# Altium PCB 拼版.PcbDoc (part 3 of 3)
Units mm, origin at the board's own origin, x right, y up, seen from the top; angles counter-clockwise.
Board outline 152.4 x 101.6 mm, 4 copper layers (Top Layer, Mid-Layer 1, Mid-Layer 2, Bottom Layer); 303 components, 0 nets, 1078 pads, 478 vias.
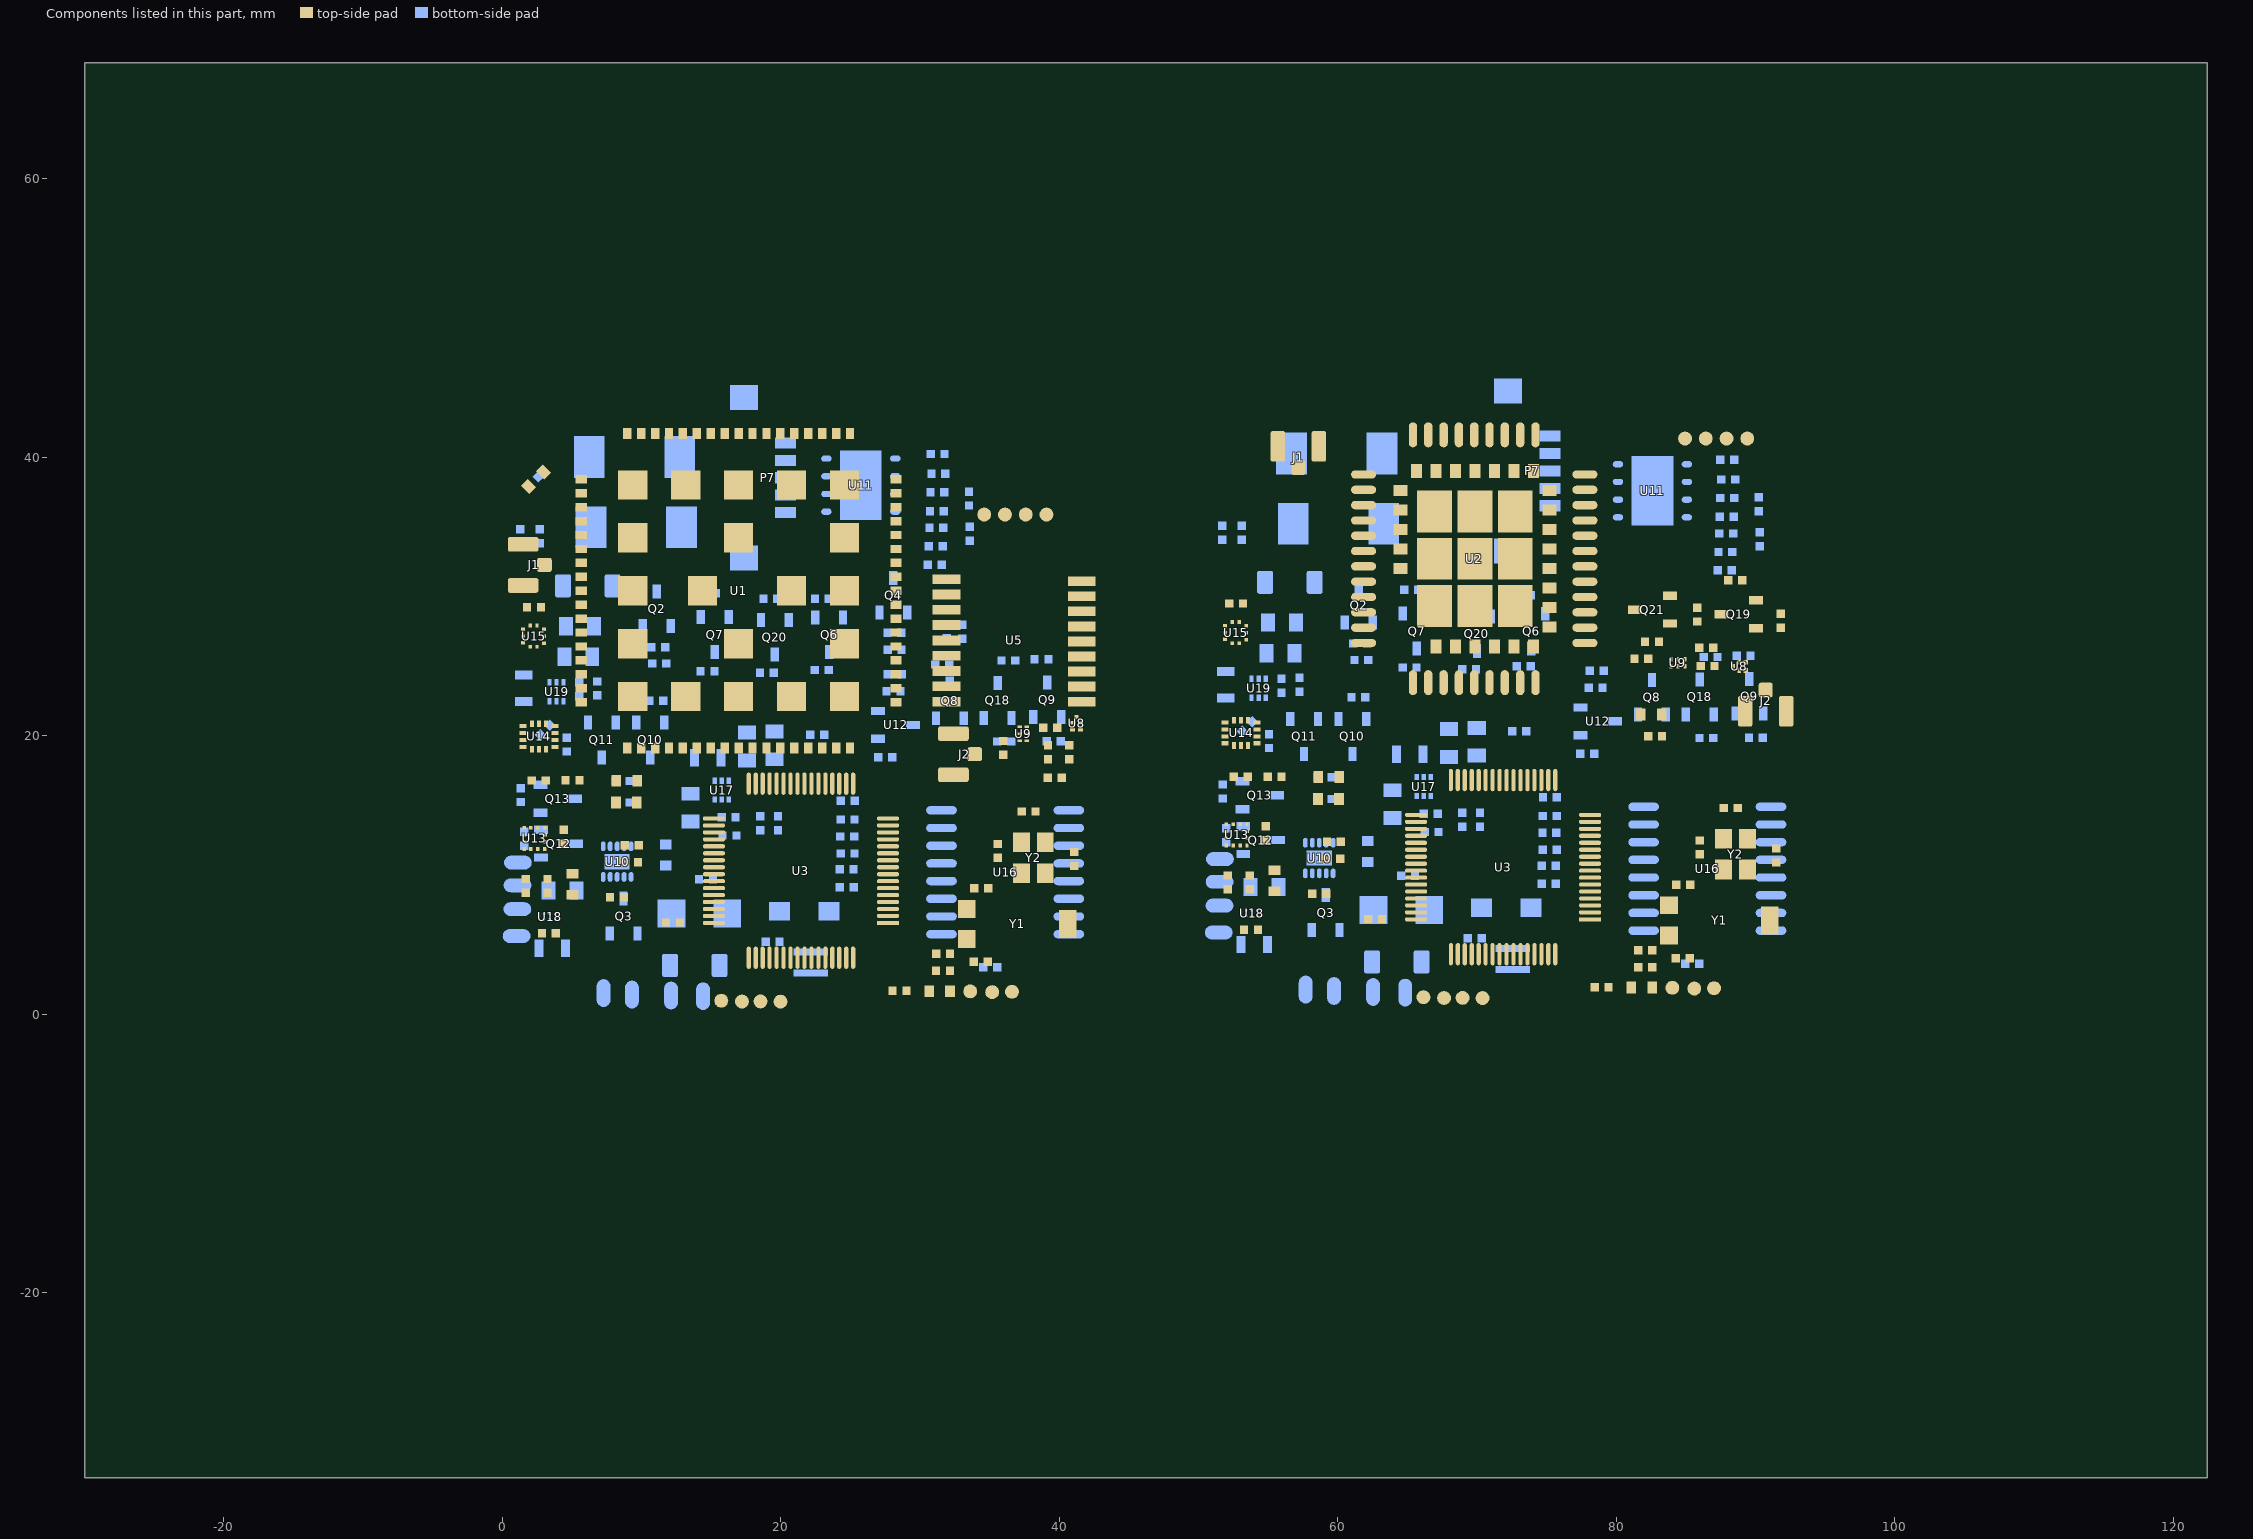
[diagram p5: the components of this part, seen from the top]

## Other copper (continued)
Bottom Layer:
  rectangle: 57.76,10.668 60.487,11.735
  rectangle: 6.35,10.439 10.085,11.455
  region: 63.285,16.564 64.676,16.564 65.322,15.918 65.817,15.918 65.835,15.9 65.835,15.458 65.813,15.436 65.808,15.441 65.424,15.441 65.33,15.348 63.431,15.348 63.285,15.494
  region: 66.526,17.279 66.529,17.282 66.882,17.282 67.315,17.715 67.315,18.98 67.382,19.048 70.631,19.048 70.675,19.004 70.675,18.086 70.465,17.876 68.215,17.876 67.126,16.787 66.526,16.787
  region: 54.211,24.603 54.213,24.6 54.213,24.156 54.248,24.122 54.448,24.122 54.448,25.013 54.012,25.448 53.019,25.448 52.619,25.048 51.326,25.048 51.238,24.96 51.238,24.352 51.327,24.263 52.594,24.263 52.939,24.607 54.173,24.607 54.173,24.196 54.214,24.155
  region: 54.284,40.608 55.841,42.164 57.812,42.164 58.124,41.853 58.124,33.705 55.989,31.57 55.989,30.972 55.596,30.579 55.596,24.471 56.303,24.395 56.316,23.697 55.323,23.632 55.049,23.826 54.625,23.823 54.644,24.999 54.314,25.46
  region: 12.866,16.31 14.257,16.31 14.903,15.664 15.398,15.664 15.416,15.646 15.416,15.204 15.394,15.182 15.389,15.187 15.005,15.187 14.911,15.094 13.012,15.094 12.866,15.24
  region: 16.107,17.025 16.11,17.028 16.463,17.028 16.896,17.461 16.896,18.726 16.963,18.794 20.212,18.794 20.256,18.75 20.256,17.832 20.046,17.622 17.796,17.622 16.707,16.533 16.107,16.533
  region: 3.792,24.349 3.794,24.346 3.794,23.902 3.829,23.868 4.029,23.868 4.029,24.759 3.593,25.194 2.6,25.194 2.2,24.794 0.907,24.794 0.819,24.706 0.819,24.098 0.908,24.009 2.175,24.009 2.52,24.353 3.754,24.353 3.754,23.942 3.795,23.901
  region: 3.865,40.354 5.422,41.91 7.393,41.91 7.705,41.599 7.705,33.451 5.57,31.316 5.57,30.718 5.177,30.325 5.177,24.217 5.884,24.141 5.897,23.443 4.904,23.378 4.63,23.572 4.206,23.569 4.225,24.745 3.895,25.206

## Silkscreen, mask and mechanical layers (free items; w line width, h text height)
Top Overlay:
  rectangle: 80.543,37.414 89.484,42.342
  rectangle: 30.531,37.363 39.472,42.291
  lines w0.127: 1.034,24.423 1.424,24.814 ; 1.533,27.313 1.539,27.313 ; 1.833,24.405 1.424,24.814 ; 3.68,21.74 4.089,22.149 ; 3.699,22.539 4.089,22.149 ; 24.417,0.19 24.423,0.19 ; 24.814,-0.2 24.423,0.19 ; 24.832,0.599 24.423,0.19 ; 27.088,0.19 24.423,0.19 ; 51.952,27.567 51.958,27.567 ; 52.213,33.694 52.603,34.085 ; 53.012,33.676 52.603,34.085 ; 54.859,31.011 55.268,31.42 ; 54.878,31.81 55.268,31.42 ; 74.836,0.444 74.842,0.444 ; 75.233,0.054 74.842,0.444 ; 75.251,0.853 74.842,0.444 ; 77.507,0.444 74.842,0.444 ; 1.424,24.814 1.424,22.149 4.089,22.149 ; 52.603,34.085 52.603,31.42 55.268,31.42
  text "NBIOT Tracer" at 79.096,34.874 h2.54
  text "4G Tracer" at 30.709,34.849 h2.54
  text "Y" at 51.966,33.604 h0.51
  text "V1.0" at 33.655,32.741 h2.54
  text "X" at 55.065,32.715 h0.51 r180
  text "V1.0" at 82.779,32.664 h2.54
  text "Y" at 0.787,24.333 h0.51
  text "X" at 3.886,23.444 h0.51 r180
  text "5V2" at 6.071,4.369 h1.27
  text "VCC_IN" at 11.735,4.267 h1.27 r270
  text "GND" at 10.16,3.302 h1.27 r270
  text "VBAT" at 14.478,3.251 h1.27 r270
  text "G" at 6.045,3.2 h1.27
  text "GND" at 13.132,3.023 h1.27 r270
  text "5V1" at 6.02,2.083 h1.27
  text "Y" at 73.894,1.033 h0.51 r180
  text "G" at 5.918,0.965 h1.27
  text "Y" at 23.475,0.779 h0.51 r180
Bottom Overlay:
  text "SWCLK" at 69.52,4.826 h1.27 r90
  text "SWD" at 72.085,3.734 h1.27 r90
  text "3.3V" at 68.275,3.226 h1.27 r90
  text "G" at 70.764,1.626 h1.27 r90
Mechanical 1:
  circle w0.127: c91.919,1.754 r1.2
  circle w0.127: c51.919,41.754 r1.2
  circle w0.127: c91.919,41.754 r1.2
  circle w0.127: c51.919,1.754 r1.2
  circle w0.127: c41.5,1.5 r1.2
  circle w0.127: c1.5,41.5 r1.2
  circle w0.127: c41.5,41.5 r1.2
  circle w0.127: c1.5,1.5 r1.2
  lines w0.127: 0,-0.019 43,0 43,43 ; 0,0 0,43 43,43 ; 42.795,42.795 43,43 ; 50.419,0.235 93.419,0.254 93.419,43.254 ; 50.419,0.254 50.419,43.254 93.419,43.254 ; 93.214,43.049 93.419,43.254

## Text inside footprints (layer, text, board x,y; h text height)
BATT: Bottom Overlay "+" at 72.822,5.238 h1.02
BATT: Bottom Overlay "+" at 22.403,4.984 h1.02